# Altium PCB xxx-xx-xxxx.PcbDoc
Units mil, origin at the board's own origin, x right, y up, seen from the top; angles counter-clockwise.
Board outline 1150 x 1000 mil, 2 copper layers (Top Layer, Bottom Layer), stack 61.756 mil thick; 22 components, 15 nets, 80 pads, 10 vias.
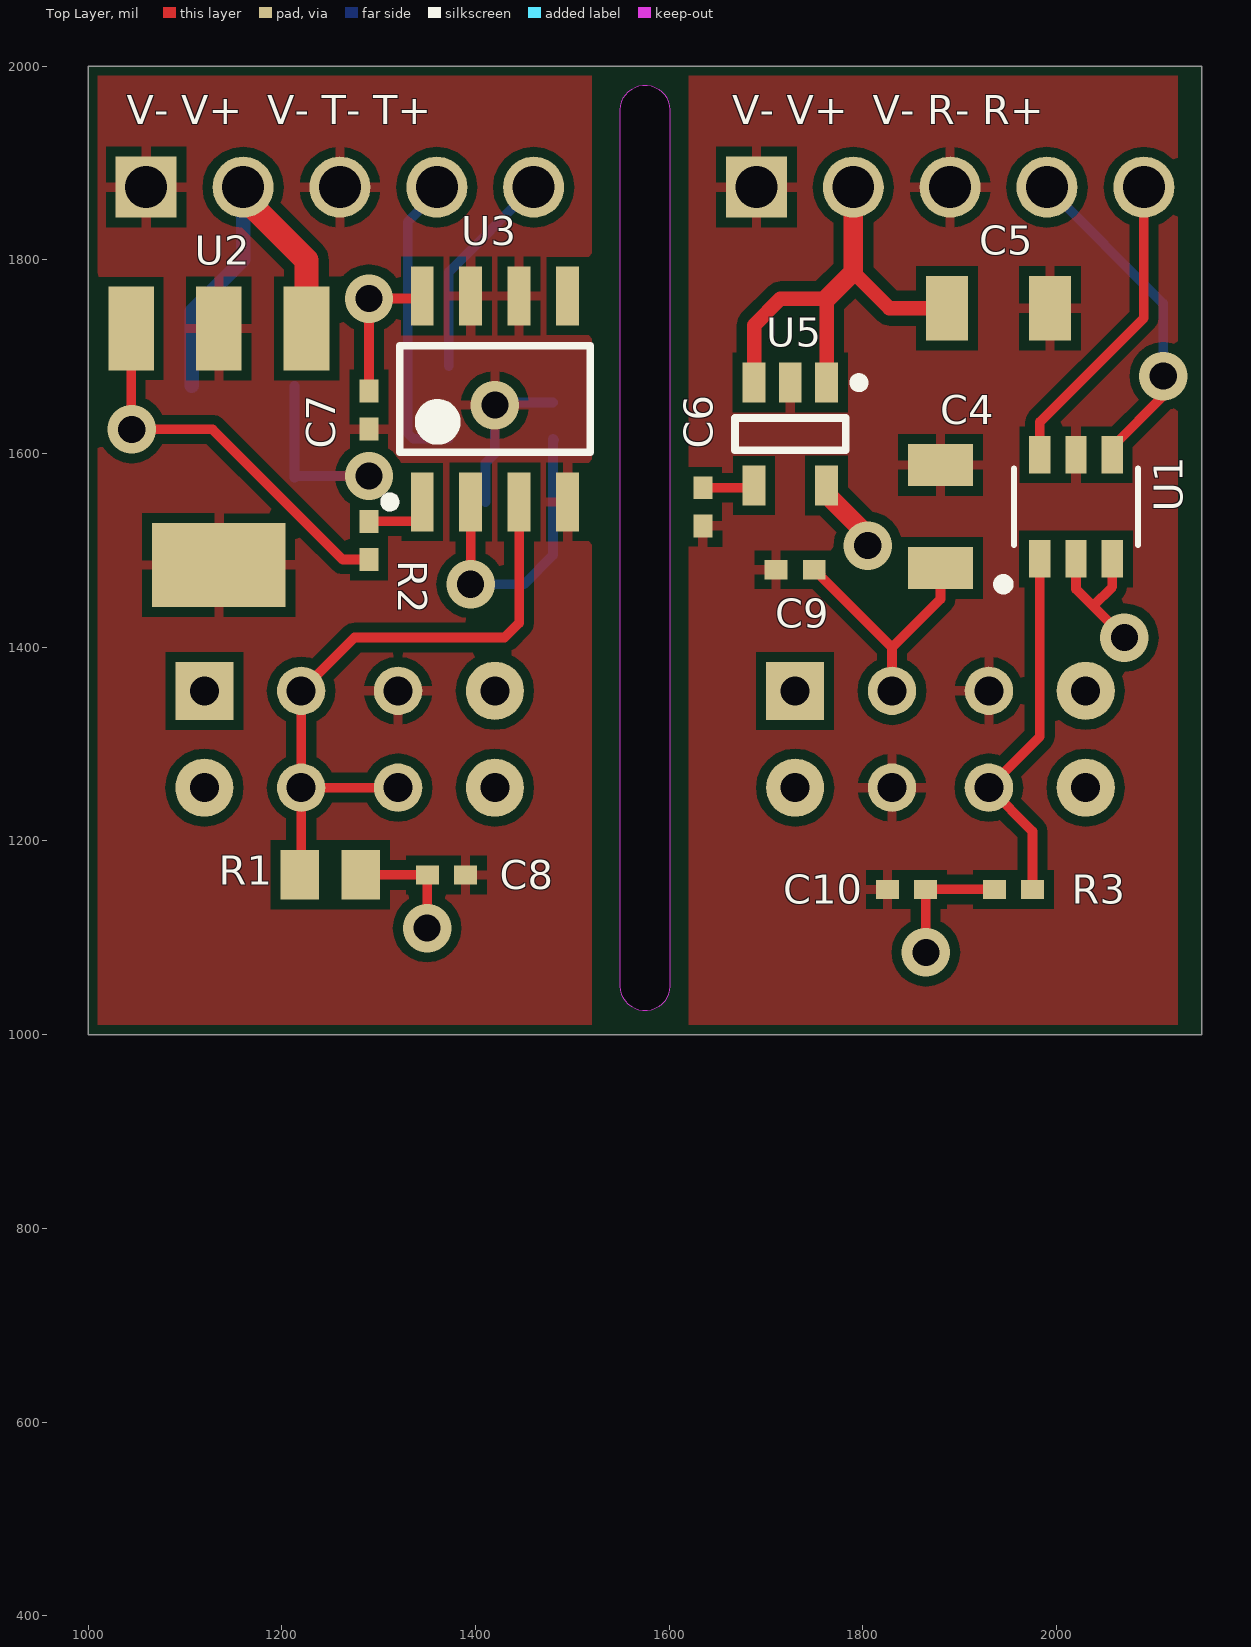
[diagram p0: Top Layer view]
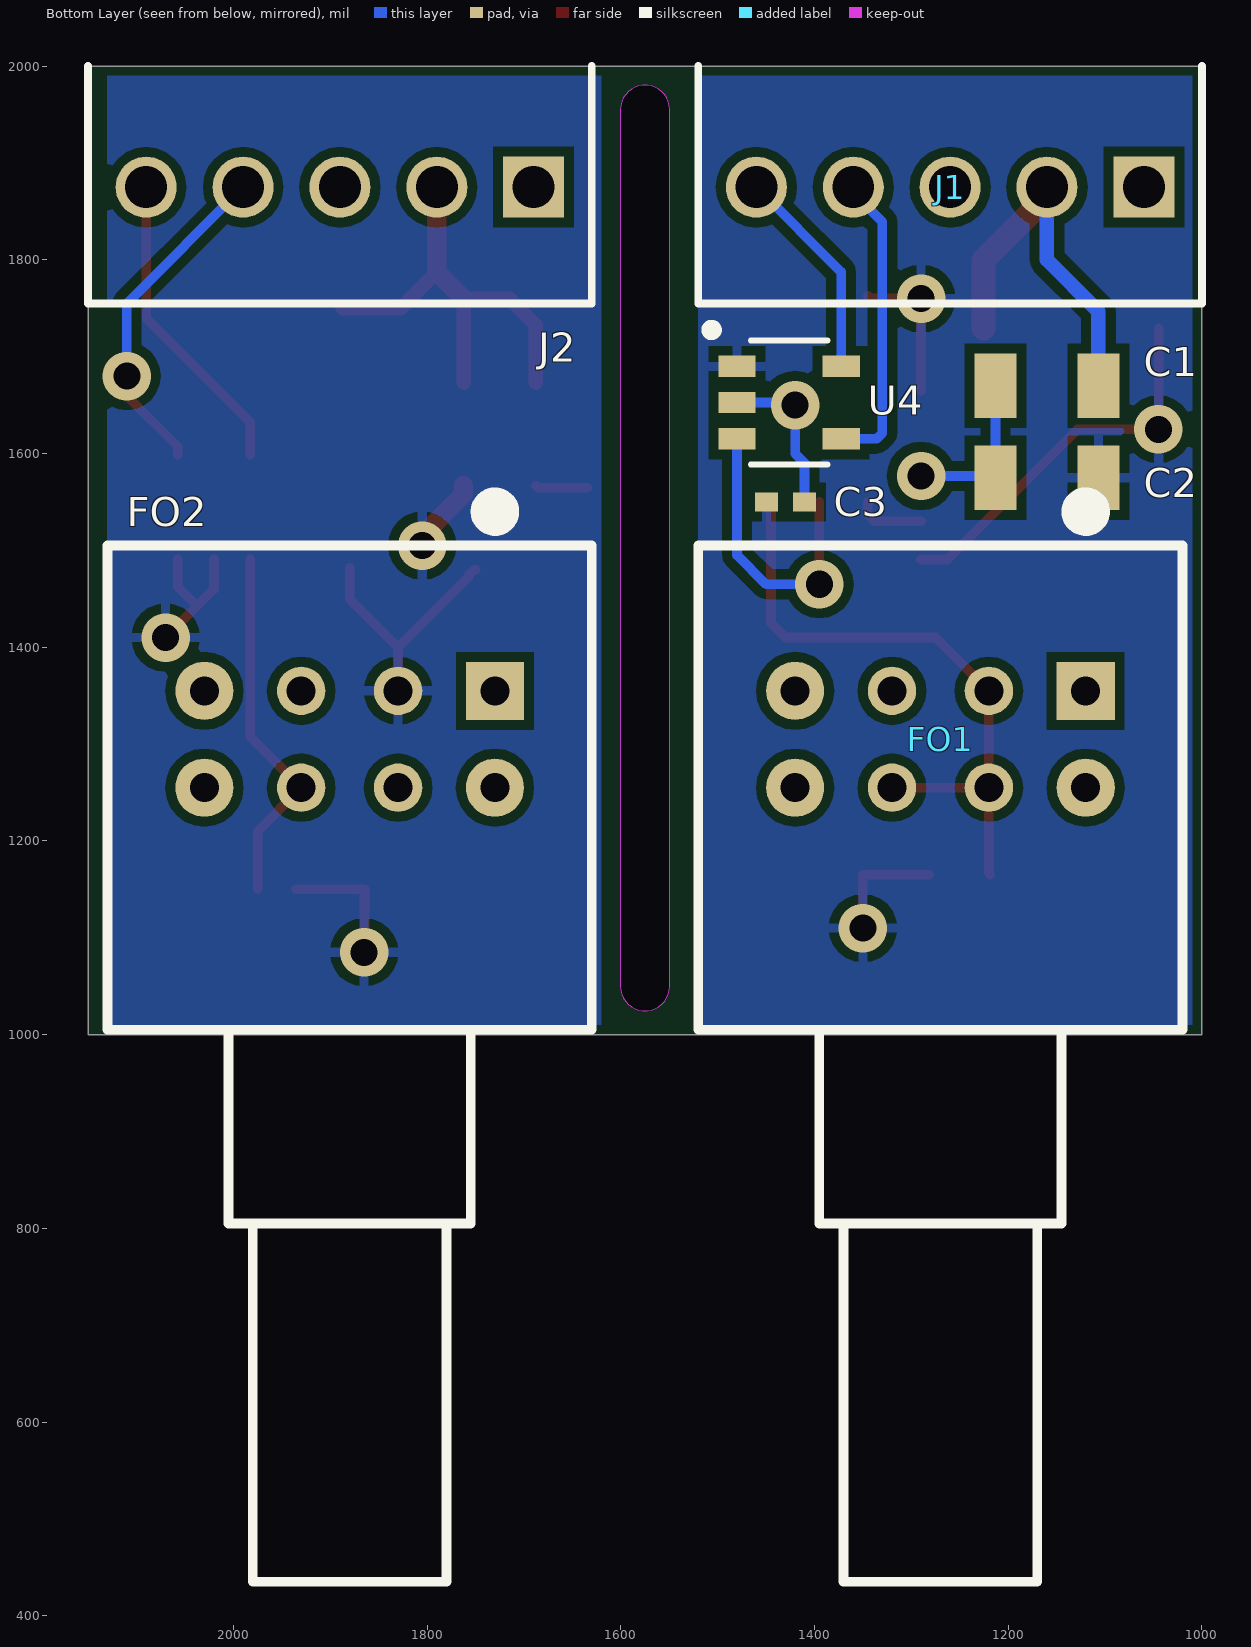
[diagram p1: Bottom Layer view, seen from below]

## Layer stack, top to bottom
Top Solder: solder mask 1, SM-001, Dk 4
Top Layer: signal copper 1.378
Dielectric 1: core 59, Core-043, Dk 4.3
Bottom Layer: signal copper 1.378
Bottom Solder: solder mask 1, SM-001, Dk 4

## Board outline
1000,1000 2150,1000 2150,2000 1000,2000
cut-out: 1549.5,1050 1549.5,1955 cw(c1575,1955) 1600.5,1955 1600.5,1050 cw(c1575,1050)

## Design rules (kind name [scope] priority, off if disabled: settings)
Clearance [All] p1: gap=10 ignorepadtopadclearanceinfootprint=FALSE except(0: Arc-Hole Track-Hole SMDPad-Hole THPad-Hole Via-Hole Fill-Hole Poly-Hole Region-Hole Text-Hole)
PolygonConnect [All] p1: connectstyle=Relief reliefconductorwidth=10 reliefentries=4 polygonreliefangle="90 Angle" airgapwidth=10
RoutingVias [All] p1: holewidth=28 width=50 viastyle="Through Hole" minholewidth=28 minwidth=50 maxholewidth=28 maxwidth=50
SolderMaskExpansion [All] p1: expansion=4 istentingtop=FALSE
Width [All] p1: maxlimit=25 minlimit=10 preferedwidth=10
30 further rules are at their usual default settings.

## Components (designator, comment, footprint, x,y, rotation, side; value= is the part's Value field where it differs from the comment)
C1 "GRM31CR71H225KA88L" 1206 1160,1670 r180 bottom value=2.2u
C2 "GRM31CR71H225KA88L" 1206 1160,1575 r180 bottom value=2.2u
C3 "GRM155R71H103KA88" 0402 1430,1550 r0 bottom value=10n
C4 "GRM31CR71H225KA88L" 1206 1880,1535 r270 top value=2.2u
C5 "GRM31CR71H225KA88L" 1206 1940,1750 r180 top value=2.2u
C6 "GRM155R71H103KA88" 0402 1635,1545 r90 top value=10n
C7 "GRM155R71H103KA88" 0402 1290,1645 r90 top value=10n
C8 "GRM155R71H103KA88" 0402 1370,1165 r180 top value=10n
C9 "GRM155R71H103KA88" 0402 1730,1480 r0 top value=10n
C10 "GRM155R71H103KA88" 0402 1845,1150 r0 top value=10n
FO1 "HFBR-1412TZ-TX" HFBR-x41xTZ 1270,1255 r180 bottom locked
FO2 "HFBR-24x2TZ-RX" HFBR-x41xTZ 1880,1255 r180 bottom locked
J1 "MPT 0,5/ 4-2,54" "MPT 0,5/ 5-2,54" 1260,1875 r0 bottom locked
J2 "MPT 0,5/ 4-2,54" "MPT 0,5/ 5-2,54" 1890,1875 r0 bottom locked
R1 "CRCW0805115RFKEAHP" 0805 1250,1165 r0 top value=115
R2 "CRCW04021K00FKED" 0402 1290,1510.32 r270 top value=1k
R3 "CRCW04021K00FKED" 0402 1955.32,1150 r180 top value=1k
U1 "MAX3293AUT" SOT23-6 2020,1545 r90 top
U2 "LM340MPX-5.0/NOPB" LM340MPX-5.0/NOPB 1225.55,1729.09 r180 top
U3 "SN75462DR" SOP-8 1420,1656.3 r90 top
U4 "MAX3280E" SOT23-5 1426.25,1652.6 r180 bottom
U5 "LP2985-33DBVR" TI-DBV5_V 1725,1620 r270 top

## Footprints (in the part's own frame and the unit in brackets; to place one, negate y for a bottom-side part, rotate by r counter-clockwise, add the part's x,y. Pads: shape width x height; smd on the part's side, far side on the other; paste and mask are expansions set on the pad)
0402 [mm] "Chip Capacitor, Body 1.0x0.5mm, IPC High Density"
  rect 0.6x0.5 smd: 1(-0.5,0) 2(0.5,0)
  body extent -0.55,-0.3 0.55,0.3, height 1.3
0805 [mm] "Chip Resistor, Body 2.0x1.2mm, IPC High Density"
  rect 1x1.3 smd: 1(-0.8,0) 2(0.8,0)
  body extent -1.07,-0.7 1.07,0.7, height 0.7
1206 [mm] "Chip Capacitor, Body 3.2x1.6mm, IPC High Density"
  rect 1.1x1.7 smd: 1(-1.35,0) 2(1.35,0)
  body extent -1.7,-0.9 1.7,0.9, height 1.3
HFBR-x41xTZ [mil] "HFBRx41xTZ ST threaded port fiber optic"
  rect 60x60 hole 30: 1(150,100)
  round 50 hole 30: 2(50,100) 3(-50,100) 6(-50,0) 7(50,0)
  round 60 hole 30: 4(-150,100) 5(-150,0) 8(150,0)
  silkscreen extent -250,-820 250,295, body extent -250,-821 250,250, height 412
LM340MPX-5.0/NOPB [mm] "JEDEC TO-261 Variation AA"
  rect 1.2x2.2 smd: 1(0,0) 2(2.3,0) 3(4.6,0)
  rect 3.5x2.2 smd: 4(2.3,6.2)
  body extent -0.96,-0.07 5.54,6.93, height 1.64
"MPT 0,5/ 5-2,54" [mm] "1725685"
  rect 1.6x1.6 hole 1.1: 1(-5.08,0)
  round 1.6 hole 1.1: 2(-2.54,0) 3(0,0) 4(2.54,0) 5(5.08,0)
  silkscreen extent -6.6,-3.17 6.6,3.05, body extent -6.58,-3.15 6.58,3.05, height 8.5
SOP-8 [mm] "SOP, 8-Leads, Body 4.90x3.90mm, Pitch 1.27mm, IPC High Density"
  rect 1.55x0.6 smd: 1(-2.7,1.905) 2(-2.7,0.635) 3(-2.7,-0.635) 4(-2.7,-1.905) 5(2.7,-1.905) 6(2.7,-0.635) 7(2.7,0.635) 8(2.7,1.905)
  silkscreen extent -2.82,-2.5 1.4,2.88, body extent -2,-2.5 2,2.5, height 1.75
SOT23-5 [mil]
  rect 38.5x22 smd paste+0 mask+0: 1(-53.75,37.4) 2(-53.75,0) 3(-53.75,-37.4) 4(53.75,-37.4) 5(53.75,37.4)
  silkscreen extent -85,-64 40,80, body extent -59,-59 59,59, height 58
SOT23-6 [mil]
  rect 38.5x22 smd paste+0 mask+0: 1(-53.75,37.4) 2(-53.75,0) 3(-53.75,-37.4) 4(53.75,-37.4) 5(53.75,0) 6(53.75,37.4)
  silkscreen extent -85,-64 40,80, body extent -59,-59 59,59, height 58
TI-DBV5_V [mm] "SOT23, 5-Leads, Body 3.05x1.75mm, Pitch 0.95mm"
  rect 1.05x0.6 smd paste-0.025 mask+0.07: 1(-1.35,0.95) 2(-1.35,0) 3(-1.35,-0.95) 4(1.35,-0.95) 5(1.35,0.95)
  silkscreen extent -1.47,-1.45 0.43,1.92, body extent -1.5,-1.53 1.5,1.53, height 1.45

## Part data
C1 C2 C4 C5: library part GRM31CR71HxxxKdddd, "-55-125C, 3216, 50V, X7R, ±10%"
C3 C6 C7 C8 C9 C10: library part GRM155R71HxxxKdddd, "-55-125C, 1005, 50V, X7R, ±10%"
FO1: library part HFBR-14x2TZ-TX, "HFBR-14x2TZ-TX fiber optic threaded ST port"
FO2: "HFBR-24x2TZ-RX fiber optic ST receiver"
J1 J2: library part "MPT 0,5/ 5-2,54"
R1: library part R-MISC, "0.125W, -55-155C, 1005, 50V, ±1%"
R2 R3: library part CRCW0402xxxxFKED, "0.125W, -55-155C, 1005, 50V, ±1%"
U1: "No Description Available", Manufacturer_Part_Number=MAX3293AUT+, Built_By=EMA_UL_Team, Copyright="Copyright (C) 2018 Accelerated Designs. All rights reserved", RefDes=RefDes, Revision=1, SourceLibrary=Maxim_2014-05-21, Type=DEV, Vendor="Maxim Integrated Products"
U3: "NAND Dual Peripheral drivers, SMT"
U4: Manufacturer_Part_Number=MAX3293AUT+, Built_By=EMA_UL_Team, Copyright="Copyright (C) 2018 Accelerated Designs. All rights reserved", RefDes=RefDes, Revision=1, SourceLibrary=Maxim_2014-05-21, Type=DEV, Vendor="Maxim Integrated Products"
U5: library part CMP-019-00026-1, "Single Output Low Noise LDO, 150 mA, Fixed 3.3 V Output, 1.5% Tolerance, 2.2 to 16 V Input, Low IQ, 5-Pin SOT-23 (DBV), -40 to 125 degC, Green (RoHS & no Sb/Br), Tape and Reel", Case/Package=SOT-23-5, Dropout Voltage=3mV, Manufacturer="Texas Instruments", Max Input Voltage=16V, Max Operating Temperature=125°C, Max Ouput Current=150mA, Min Input Voltage=2.2V, Min Operating Temperature=-40°C, Nominal Output Voltage=3.3V, Package Description="5-Pin Small Outline Transistor, Body 2.9 x 1.6 mm, Pitch 0.95 mm", Package Quantity=3000, Package Reference=DBV5, Package Version="4073253-4/N, 12/2014", Datasheet URL=http://www.ti.com/lit/ds/symlink/lp2985-50.pdf, Datasheet Version="SLVS522O, 01/2015", Manufacturer URL=http://www.ti.com/, Mounting Technology=SM, Output Current=150mA, Output Voltage=3.3V, Outputs=1, Package URL=http://www.ti.com/lit/ml/mpds018l/mpds018l.pdf, Packaging=TapeandReel, Pins=16, RoHS Compliant=True

## Via types
v1: diameter 50, hole 28, Top Layer to Bottom Layer, 10 vias

## Nets (pads, with @x,y where several pads share a name; then routed paths per layer and width w, separated by ;. In a path a pad name is that pad's centre, name@x,y a point inside that pad or via, vN(x,y) a via of type N, cw(c..) or ccw(c..) an arc to the next point about the centre after c; other vN are vias at no path point)
NetC6_2: C6.2 U5.4 | length 53.5
  Top Layer w10: C6.2 1685.43,1564.69 U5.4
NetFO1_2: FO1.2 FO1.6 FO1.7 R1.1 U3.3 | length 669.6
  Top Layer w10: R1.1 1220,1166.5 FO1.7 ; FO1.6 FO1.7 ; U3.3 1445,1425 1430,1410 1275,1410 FO1.2 FO1.7
NetFO2_6: FO2.6 R3.1 U1.1 | length 381.7
  Top Layer w10: R3.1 1975,1210 FO2.6 1982.6,1307.6 U1.1
NetR2_1: R2.1 U3.1 | length 71
  Top Layer w10: R2.1 1338.19,1530 1345,1536.81 U3.1
NetU3_2: U3.2 U4.3 | length 304.5
  Top Layer w10: v1(1395,1465) U3.2
  Bottom Layer w10: v1(1395,1465) 1450,1465 1480,1495 U4.3 U4.3@1481.35,1613.84
p5V0: C2.2 C3.2 C7.2 C8.2 R1.2 R2.2 U2.3 U3.8 U4.1 | length 680.3
  Top Layer w10: U2.3 1044.45,1625.55 v1(1045,1625) 1128.42,1625 1262.79,1490.63 R2.2 ; R1.2 C8.2 1350.31,1115.31 1350,1115 v1(1350,1110) ; C7.2 v1(1290,1760) 1342.4,1760 U3.8
p12V0: C1.2 J1.2 U2.1 | length 400.1
  Top Layer w25: J1.2 1160,1865 1225.55,1799.45 U2.1
  Bottom Layer w15: C1.2 1106.85,1746.85 1160,1800 J1.2
pGND: C1.1 C2.1 C3.1 C7.1 C8.1 FO1.3 J1.1 J1.3 U2.2 U2.4 U3.4 U3.6 U3.7 U4.2 | length 337.7
  Bottom Layer w10: C1.1 C2.1 1214.96,1576.81 v1(1290,1576.81) ; C3.1 1410.32,1590.32 1420,1600 v1(1420,1650) 1422.6,1652.6 U4.2
q3V3: C4.2 C9.2 C10.2 FO2.2 R3.2 U1.2 U1.3 U5.5 | length 636.8
  Top Layer w10: C9.2 1751.65,1480 1756.5,1475.16 1756.5,1473.19 1830,1399.69 ; FO2.2 1830,1399.69 ; v1(1865,1085) 1865,1095 1864.69,1095.31 C10.2 R3.2 ; C4.2 1880,1449.69 1830,1399.69 ; U1.2 2020,1460 2037.5,1442.5 ; U1.3 2057.4,1462.4 2037.5,1442.5 ; v1(2070,1410) 2037.5,1442.5
  Top Layer w20: U5.5 1762.4,1557.99 1805,1515.39 v1(1805,1505)
q12V0: C5.2 J2.2 U5.1 U5.3 | length 471.1
  Top Layer w15: U5.3 1687.6,1732.6 1714.79,1759.79 1762.4,1759.79 U5.1 ; 1790,1787.39 1827.39,1750 C5.2
  Top Layer w20: 1762.4,1759.79 1790,1787.39 J2.2
qGND: C4.1 C5.1 C6.1 C9.1 C10.1 FO2.3 FO2.7 J2.1 J2.3 U1.5 U5.2
RX+: J2.5 U1.6 | length 320.7
  Top Layer w10: U1.6 1982.6,1632.6 2090,1740 J2.5
RX-: J2.4 U1.4 | length 347.7
  Top Layer w10: U1.4 2057.4,1607 2110,1659.6 v1(2110,1680)
  Bottom Layer w10: J2.4 2110,1755 v1(2110,1680)
TX+: J1.5 U4.5 | length 221.2
  Bottom Layer w10: U4.5 1372.5,1787.5 J1.5
TX-: J1.4 U4.4 | length 311.3
  Bottom Layer w10: J1.4 1360,1869.24 1330,1839.24 1330,1621.05 1335.86,1615.2 U4.4
pads on no net: FO1.1 FO1.4 FO1.5 FO1.8 FO2.1 FO2.4 FO2.5 FO2.8 U3.5

## Polygon pours and split planes (outlines as drawn)
q3V3 on Bottom Layer "Q3V3_L02_P003" (solid, pour order 3): 1620,1990 1620,1010 2130,1010 2130,1990
p5V0 on Bottom Layer "P5V0_L02_P002" (solid, pour order 2): 1010,1990 1010,1010 1520,1010 1520,1990
qGND on Top Layer "QGND_L01_P004" (solid, pour order 4): 1620,1990 1620,1010 2125,1010 2125,1990
pGND on Top Layer "PGND_L01_P001" (solid, pour order 1): 1010,1990 1010,1010 1520,1010 1520,1990

## Silkscreen, mask and mechanical layers (free items; w line width, h text height)
Top Overlay:
  text "V- V+  V- T- T+" at 1040,1940 h30
  text "V- V+  V- R- R+" at 1665,1940 h30
Mechanical 1:
  lines w10: 1000,1000 2150,1000 2150,2000 1000,2000 1000,1000 ; 1549.5,1050 ccw(c1575,1050) 1600.5,1050 1600.5,1955 ccw(c1575,1955) 1549.5,1955 1549.5,1050

## Dimensions
1000,2000 to 2150,2000 on Mechanical 1
1000,1000 to 1000,2000 on Mechanical 1

## Text inside footprints (layer, text, board x,y; h text height)
U1: Mechanical 13 "*" at 2014,1513 h50 r90
U4: Mechanical 13 "*" at 1458.25,1658.6 h50